# Altium PCB Main.PcbDoc (part 3 of 4)
Units mm, origin at the board's own origin, x right, y up, seen from the top; angles counter-clockwise.
Board outline 172.29 x 85.1 mm, 6 copper layers (Component Side, Ground Plane, Signal Layer 1, Signal Layer 2, Power Plane, Solder Side), stack 1.297 mm thick; 277 components, 256 nets, 1030 pads, 416 vias.
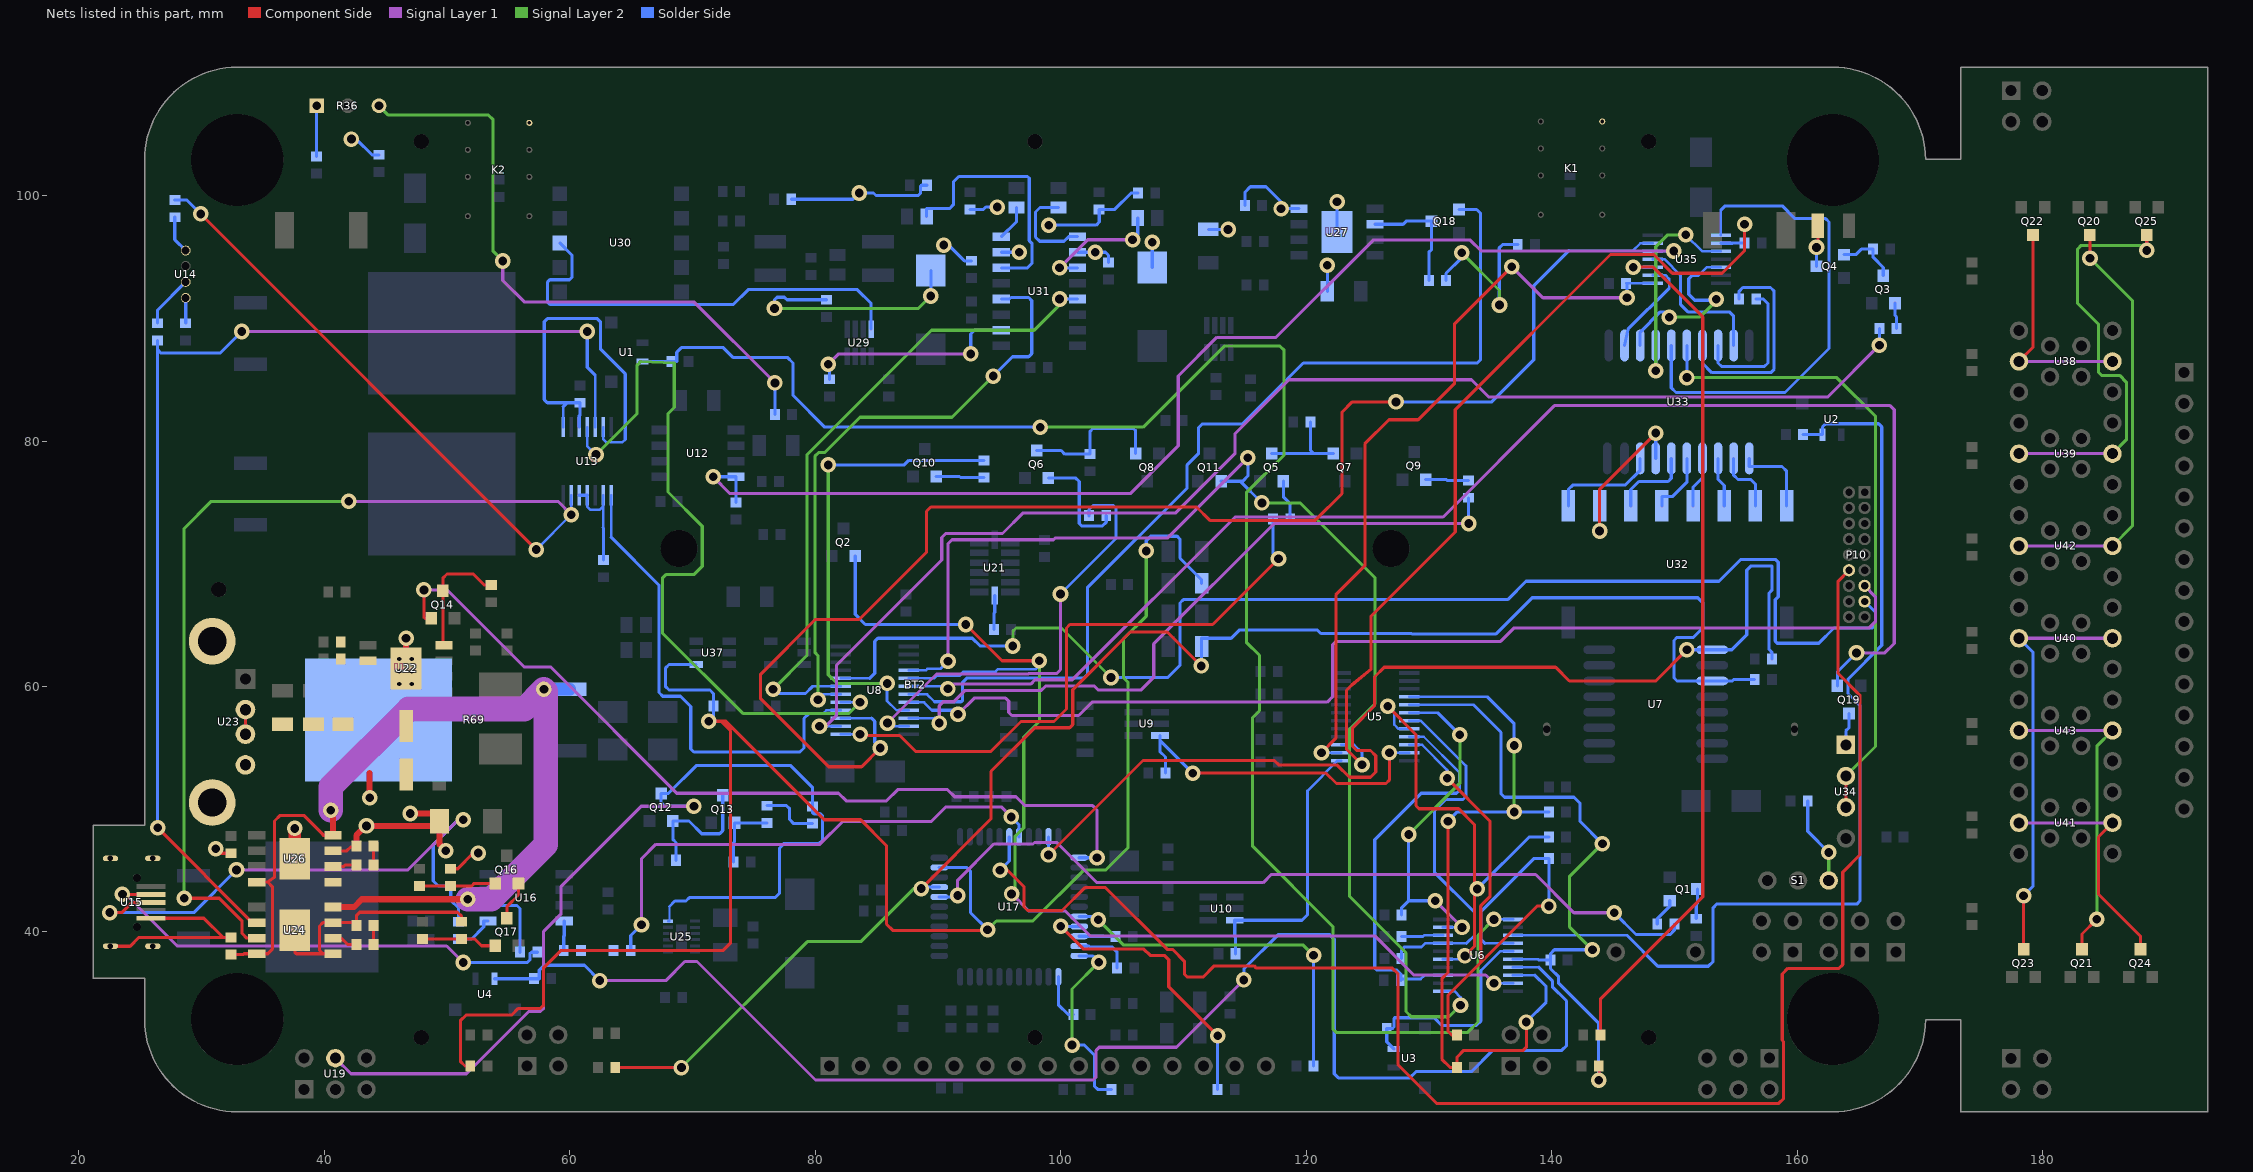
[diagram p7: the nets of this part, all layers, seen from the top]

## Via types
v1: diameter 1.27, hole 0.711, Component Side to Solder Side, tented both sides, 407 vias
v2: diameter 0.66, hole 0.33, Component Side to Solder Side, 8 vias
v3: diameter 1.27, hole 0.711, Component Side to Solder Side, 1 vias

## Nets (pads, with @x,y where several pads share a name; then routed paths per layer and width w, separated by ;. In a path a pad name is that pad's centre, name@x,y a point inside that pad or via, vN(x,y) a via of type N, cw(c..) or ccw(c..) an arc to the next point about the centre after c; other vN are vias at no path point) (continued)
NetP10_12: P10.12 U17.6 | length 132.4
  Component Side w0.254: v1(95.047,45.034) 95.656,45.034 97.003,43.688 97.003,42.037 97.282,41.758 100.099,41.758 101.956,43.614 103.632,43.614 108.66,38.586 109.093,38.586 110.058,37.621 110.058,36.576 110.312,36.322 111.582,36.322 112.497,37.236 115.748,37.236 115.926,37.059 127,37.059 127.483,36.576 127.483,29.159 130.607,26.035 158.496,26.035 158.877,26.416 158.877,31.081 158.769,31.189 158.769,36.576 159.226,37.033 163.398,37.033 163.703,37.338 163.703,44.882 165.1,46.279 165.1,59.284 163.322,61.062 163.322,68.58 P10.12@164.211,69.469
  Solder Side w0.254: v1(95.047,45.034) 95.796,45.783 U17.6@95.796,47.752
NetP10_13: P10.13 U8.8 | length 89.8
  Signal Layer 1 w0.254: v1(91.618,57.734) 92.939,59.055 95.504,59.055 95.758,58.801 95.758,57.887 96.012,57.633 101.448,57.633 102.54,58.725 121.691,58.725 122.149,59.182 122.149,63.398 122.428,63.678 135.831,63.678 136.931,64.778 165.862,64.778 166.362,65.278 166.362,67.318 P10.13@165.481,68.199
  Solder Side w0.21: U8.8@87.611,58.715 88.849,58.715 89.5,58.064
  Solder Side w0.254: 89.5,58.064 91.288,58.064 v1(91.618,57.734)
NetP10_15: P10.15 U8.20 | length 107.2
  Signal Layer 2 w0.254: v1(96.088,63.297) 96.088,64.516 96.342,64.77 100.051,64.77 v1(104.089,60.731)
  Solder Side w0.21: U8.20@82.061,60.665 84.43,60.665
  Solder Side w0.254: 84.43,60.665 84.836,61.071 84.836,63.678 85.09,63.932 92.786,63.932 93.421,63.297 v1(96.088,63.297) ; v1(104.089,60.731) 108.712,60.731 109.703,61.722 109.703,66.802 109.982,67.081 136.398,67.081 137.897,68.58 153.619,68.58 155.372,70.333 158.242,70.333 158.445,70.129 158.445,67.31 158.2,67.065 158.2,63.694 158.369,63.525 161.747,63.525 162.992,64.77 166.116,64.77 166.37,65.024 166.37,66.04 P10.15@165.481,66.929
NetQ1_1: Q1.1 R2.2 | length 2.5
  Solder Side w0.254: R2.2@151.765,41.086 151.765,42.24 151.856,42.331 Q1.1@151.856,43.5
NetQ1_2: Q1.2 R1.2 | length 2.3
  Solder Side w0.254: R1.2@148.587,40.64 148.587,41.072 149.606,42.091 Q1.2@149.606,42.55
NetQ2_2: Q2.2 U6.19 U8.5 | length 96.6
  Component Side w0.254: v1(92.253,65.049) 95.2,62.103 v1(98.247,62.103)
  Signal Layer 1 w0.254: v1(95.987,43.104) 97.384,41.707 100.355,41.707 102.374,39.688 125.564,39.688 128.753,36.5 134.606,36.5 v1(135.28,35.825)
  Signal Layer 2 w0.254: v1(95.987,43.104) 96.253,43.37 96.253,47.764 96.977,48.488 96.977,55.88 98.247,57.15 v1(98.247,62.103)
  Solder Side w0.21: U8.5@87.611,60.665 89.665,60.665 89.872,60.872 91.73,60.872 92.07,61.212 94.678,61.212 94.858,61.392 97.917,61.392 98.247,61.722 v1(98.247,62.103) ; v1(135.28,35.825) U6.19@136.835,35.825
  Solder Side w0.254: Q2.2@83.246,70.63 83.246,65.877 84.074,65.049 v1(92.253,65.049)
NetQ3_1: Q3.1 Q4.2 R23.2 | length 5.1
  Solder Side w0.254: Q4.2@163.812,95.184 164.77,95.184 165.217,95.631 R23.2@166.178,95.631 166.178,94.959 167.005,94.132 Q3.1@167.005,93.472
NetQ3_2: Q3.2 R22.2 | length 2.1
  Solder Side w0.254: Q3.2@167.955,91.222 167.955,90.25 168.086,90.119 R22.2@168.086,89.154
NetQ4_1: Q4.1 U11.1 | length 3.3
  Component Side w0.254: v1(161.562,95.774) 161.671,95.883 U11.1@161.671,97.536
  Solder Side w0.254: Q4.1@161.562,94.234 v1(161.562,95.774)
NetQ5_1: Q5.1 Q7.2 R27.2 | length 7.7
  Solder Side w0.254: Q5.1@117.18,78.976 120.606,78.976 ; R27.2@120.334,81.534 120.334,79.248 120.606,78.976 ; Q7.2@122.189,78.976 120.606,78.976
NetQ5_2: Q5.2 R25.2 | length 3.3
  Solder Side w0.254: Q5.2@118.13,76.726 118.13,75.457 118.683,74.905 R25.2@118.683,73.66
NetQ6_1: Q6.1 Q8.2 R29.2 | length 12.1
  Solder Side w0.254: Q6.1@98.034,79.23 100.025,79.23 100.323,78.932 R29.2@102.362,78.932 102.362,80.764 102.616,81.018 105.918,81.018 106.091,80.845 Q8.2@106.091,78.976
NetQ6_2: Q6.2 R26.2 | length 9
  Solder Side w0.254: Q6.2@98.984,76.98 101.226,76.98 101.498,76.708 101.498,73.279 101.702,73.076 103.378,73.076 103.697,73.395 R26.2@103.697,73.914
NetQ9_2: Q9.2 R28.2 | length 3.5
  Solder Side w0.254: Q9.2@129.728,76.853 131.42,76.853 131.5,76.773 R28.2@133.223,76.773
NetQ10_2: Q10.2 R30.2 | length 3.9
  Solder Side w0.254: Q10.2@89.85,77.107 91.745,77.107 91.828,77.024 R30.2@93.726,77.024
NetQ11_2: Q11.2 U6.1 U8.4 | length 103.9
  Signal Layer 1 w0.254: v1(90.805,62.055) 90.805,71.628 91.135,71.958 99.401,71.958 99.528,72.085 108.679,72.085 v1(115.235,78.641)
  Signal Layer 2 w0.254: v1(116.383,74.955) 119.507,74.955 125.586,68.876 125.586,58.581 123.52,56.515 123.52,42.901 128.118,38.303 128.118,33.528 128.549,33.096 131.623,33.096 v1(132.563,34.036)
  Solder Side w0.21: U8.4@87.611,61.315 89.006,61.315 89.154,61.463 90.213,61.463 ; U6.1@131.135,35.175 132.059,35.175 132.563,34.671 v1(132.563,34.036)
  Solder Side w0.254: 90.213,61.463 v1(90.805,62.055) ; Q11.2@113.06,76.726 114.612,76.726 ; v1(115.235,78.641) 115.235,77.153 114.808,76.726 114.612,76.726 ; v1(116.383,74.955) 114.612,76.726
NetQ12_2: Q12.2 Q13.3 R54.1 | length 10.8
  Solder Side w0.254: R54.1@68.645,45.847 68.645,47.295 68.387,47.553 Q12.2@68.387,49.04 69.705,49.04 70.739,48.006 72.202,48.006 72.456,48.26 Q13.3@72.456,51.145
NetQ13_2: Q13.2 R58.2 R60.2 | length 5.9
  Solder Side w0.254: R58.2@73.341,45.72 73.341,47.269 73.406,47.334 Q13.2@73.406,48.895 74.727,48.895 74.73,48.892 R60.2@76.073,48.892
NetQ14_1: Q14.1 R67.2 U22.4 | length 10
  Component Side w0.254: U22.4@49.757,63.373 49.657,63.373 Q14.1@49.657,67.8 49.657,68.834 49.987,69.164 52.124,69.164 53.024,68.264 R67.2@53.594,68.264
NetQ14_2: Q14.2 U17.12 | length 71.2
  Component Side w0.254: v1(48.108,67.869) 48.108,65.639 48.197,65.55 Q14.2@48.707,65.55
  Signal Layer 1 w0.254: v1(48.108,67.869) 49.99,67.869 56.26,61.599 58.416,61.599 68.707,51.308 81.88,51.308 82.507,50.681 85.793,50.681 86.712,51.6 90.768,51.6 91.346,51.022 96.349,51.022 97.079,50.292 102.591,50.292 102.946,49.936 v1(102.946,46.052)
  Solder Side w0.254: U17.12@101.496,46.052 v1(102.946,46.052)
NetQ16_2: Q16.2 R71.1 R76.2 | length 6.2
  Component Side w0.254: R71.1@47.752,43.75 48.997,43.75 R76.2@50.292,43.75 51.994,43.75 52.204,43.96 Q16.2@53.914,43.96
NetQ16_3: Q16.3 Q17.1 | length 3.2
  Component Side w0.254: Q17.1@54.864,41.13 54.864,42.062 55.814,43.012 Q16.3@55.814,43.96
NetQ17_2: Q17.2 R72.1 R75.2 | length 6.1
  Component Side w0.254: R72.1@48.006,39.432 49.581,39.432 R75.2@51.181,39.432 52.248,39.432 52.8,38.88 Q17.2@53.914,38.88
NetQ18_1: Q18.1 R82.2 U27.2 | length 9.6
  Solder Side w0.254: U27.2@125.603,97.663 127.889,97.663 128.143,97.917 Q18.1@130.193,97.917 130.193,95.587 129.983,95.377 R82.2@129.983,93.091
NetQ18_2: Q18.2 U8.7 | length 79.5
  Solder Side w0.21: U8.7@87.611,59.365 89.106,59.365 89.713,58.758
  Solder Side w0.254: 89.713,58.758 91.879,58.758 91.999,58.877 91.999,60.35 92.329,60.681 95.163,60.681 95.188,60.706 101.905,60.706 102.159,60.96 102.159,68.047 110.287,76.175 110.287,78.054 111.227,78.994 111.227,81.102 111.506,81.382 114.783,81.382 119.761,86.36 133.934,86.36 134.188,86.614 134.188,98.552 133.873,98.867 Q18.2@132.443,98.867
NetQ19_1: Q19.1 U34.1 | length 2.7
  Solder Side w0.254: U34.1@163.957,55.245 163.957,56.388 164.211,56.642 Q19.1@164.211,57.803
NetQ19_2: Q19.2 U8.6 | length 115.8
  Signal Layer 1 w0.254: v1(90.802,59.814) 91.186,60.198 97.536,60.198 97.892,60.554 100.94,60.554 114.198,73.812 131.14,73.812 140.208,82.88 167.564,82.88 167.894,82.55 167.894,63.5 167.132,62.738 v1(164.821,62.738)
  Solder Side w0.21: U8.6@87.611,60.015 v1@90.602,60.015
  Solder Side w0.254: v1@90.602,60.015 v1(90.802,59.814) ; Q19.2@163.261,60.053 163.261,61.178 v1(164.821,62.738)
NetQ20_1: Q20.1 U42.3 U42.8 | length 35.1
  Component Side w0.254: Q20.1@183.832,96.792 183.832,94.907 v1(183.845,94.894)
  Signal Layer 1 w0.254: U42.8@178.054,71.45 U42.3@185.674,71.45
  Signal Layer 2 w0.254: v1(183.845,94.894) 187.313,91.427 187.313,73.089 U42.3@185.674,71.45
NetQ21_1: Q21.1 U43.3 U43.8 | length 26.5
  Component Side w0.254: Q21.1@183.197,38.59 183.197,39.84 v1(184.404,41.046)
  Signal Layer 1 w0.254: U43.8@178.054,56.413 U43.3@185.674,56.413
  Signal Layer 2 w0.254: v1(184.404,41.046) 184.404,55.143 U43.3@185.674,56.413
NetQ22_1: Q22.1 U38.3 U38.8 | length 18.4
  Component Side w0.254: U38.3@178.054,86.487 179.197,87.63 Q22.1@179.197,96.792
  Signal Layer 1 w0.254: U38.3@178.054,86.487 U38.8@185.674,86.487
NetQ23_1: Q23.1 U40.3 U40.8 | length 33.8
  Component Side w0.254: Q23.1@178.435,38.59 v1(178.435,42.951)
  Signal Layer 1 w0.254: U40.3@178.054,63.932 U40.8@185.674,63.932
  Solder Side w0.254: U40.3@178.054,63.932 179.197,62.789 179.197,43.713 v1(178.435,42.951)
NetQ24_1: Q24.1 U41.3 U41.8 | length 19.8
  Component Side w0.254: U41.8@185.674,48.895 184.531,47.752 184.531,43.078 187.96,39.649 Q24.1@187.96,38.59
  Signal Layer 1 w0.254: U41.3@178.054,48.895 U41.8@185.674,48.895
NetQ25_1: Q25.1 U39.3 U39.8 | length 34.5
  Component Side w0.254: v1(188.468,95.529) Q25.1@188.468,96.792
  Signal Layer 1 w0.254: U39.3@178.054,78.969 U39.8@185.674,78.969
  Signal Layer 2 w0.254: U39.8@185.674,78.969 186.805,80.1 186.805,84.797 186.258,85.344 184.785,85.344 184.531,85.598 184.531,89.51 182.829,91.211 182.829,95.631 183.134,95.936 188.062,95.936 v1(188.468,95.529)
NetR1_1: R1.1 U17.40 | length 66.8
  Signal Layer 1 w0.254: v1(91.592,42.977) 91.592,44.221 94.539,47.168 97.726,47.168 97.853,47.295 99.67,47.295 102.946,44.018 116.484,44.018 117.145,44.679 138.684,44.679 141.794,41.569 v1(145.096,41.569)
  Solder Side w0.254: U17.40@90.096,42.852 91.468,42.852 v1(91.592,42.977) ; v1(145.096,41.569) 146.863,39.802 149.657,39.802 149.987,40.132 R1.1@149.987,40.64
NetR3_1: R3.1 U1.2 U6.11 | length 143
  Signal Layer 2 w0.254: v1(98.323,81.128) 106.705,81.128 113.309,87.732 117.856,87.732 118.186,87.401 118.186,78.867 115.113,75.794 115.113,63.602 116.18,62.535 116.18,58.039 115.621,57.48 115.621,46.99 122.174,40.437 122.174,32.08 122.428,31.826 133.147,31.826 133.985,32.664 133.985,39.73 v1(135.28,41.025)
  Solder Side w0.21: v1(135.28,41.025) U6.11@136.835,41.025
  Solder Side w0.254: U1.2@65.913,86.487 R3.1@68.261,86.487 68.707,86.487 68.707,87.224 69.088,87.605 72.492,87.605 73.279,86.817 77.724,86.817 78.181,86.36 78.181,83.715 80.769,81.128 v1(98.323,81.128)
NetR4_1: R4.1 U3.2 U6.15 | length 18.1
  Solder Side w0.21: 134.214,36.855 135.783,38.425 U6.15@136.835,38.425
  Solder Side w0.254: U3.2@127.127,30.48 126.554,31.053 R4.1@126.554,32.131 127.011,32.131 127.138,32.258 127.138,32.955 127.199,33.016 130.408,33.016 131.039,32.385 133.858,32.385 134.214,32.741 134.214,36.855
NetR5_1: R5.1 U2.2 U6.13 | length 81.5
  Solder Side w0.21: U6.13@136.835,39.725 146.127,39.725
  Solder Side w0.254: 146.127,39.725 148.641,37.211 152.756,37.211 153.137,37.592 153.137,41.986 153.416,42.266 164.846,42.266 165.1,42.52 165.1,58.471 164.135,59.436 164.135,60.604 166.878,63.348 166.878,81.153 166.624,81.407 162.306,81.407 162.052,81.153 U2.2@162.052,80.518 R5.1@160.466,80.518
NetR6_1: R6.1 U4.2 U6.17 | length 121.8
  Signal Layer 1 w0.254: v1(62.433,36.043) 67.818,36.043 69.367,37.592 70.358,37.592 80.01,27.94 102.616,27.94 102.87,28.194 102.87,30.353 103.124,30.607 109.423,30.607 v1(114.91,36.093)
  Solder Side w0.21: U6.17@136.835,37.125 138.94,37.125
  Solder Side w0.254: U4.2@53.848,36.195 R6.1@57.085,36.195 57.506,36.195 57.506,36.881 57.912,37.287 61.189,37.287 v1(62.433,36.043) ; v1(114.91,36.093) 114.91,36.982 117.704,39.776 121.92,39.776 122.276,39.421 122.276,28.448 122.606,28.118 128.422,28.118 128.93,28.626 133.452,28.626 135.179,30.353 140.818,30.353 141.199,30.734 141.199,34.392 140.048,35.542 140.048,36.017 138.94,37.125
NetR7_1: R7.1 U6.8 | length 3.4
  Solder Side w0.21: 129.489,39.624 129.59,39.725 U6.8@131.135,39.725
  Solder Side w0.254: R7.1@127.762,39.624 129.489,39.624
NetR8_1: R8.1 R109.2 U5.4 U6.18 | length 61.8
  Component Side w0.254: v1(131.547,49.022) 131.547,36.703 131.039,36.195 131.039,29.642 131.724,28.956 R109.2@132.269,28.956 132.269,29.794 132.828,30.353 137.668,30.353 137.922,30.607 v1(137.922,32.664)
  Signal Layer 2 w0.254: v1(136.931,49.784) v1(136.931,55.194)
  Solder Side w0.21: U5.4@128.378,59.156 134.748,59.156 ; U6.18@136.835,36.475 138.621,36.475
  Solder Side w0.254: v1(131.547,49.022) 132.309,49.784 v1(136.931,49.784) R8.1@139.762,49.784 ; 134.748,59.156 136.931,56.972 v1(136.931,55.194) ; v1(137.922,32.664) 139.54,34.282 139.54,35.556 138.621,36.475
NetR9_1: R9.1 R111.1 U5.10 U6.14 | length 52.6
  Component Side w0.254: v1(131.47,52.527) 134.953,49.045 134.953,42.865 134.214,42.126 134.214,37.516 ; R111.1@132.269,31.623 131.826,31.623 131.547,31.902 131.547,34.849 134.214,37.516 ; v1(139.762,42.113) 138.811,42.113 134.214,37.516
  Solder Side w0.21: U5.10@128.378,55.256 129.427,55.256 131.47,53.213 ; 134.534,39.075 U6.14@136.835,39.075
  Solder Side w0.254: v1(131.47,52.527) 131.47,53.213 ; 134.534,39.075 134.239,39.37 134.239,41.681 138.532,45.974 R9.1@139.762,45.974 v1(139.762,42.113)
NetR12_1: R12.1 R110.1 U5.5 U6.16 | length 54.5
  Component Side w0.254: v1(143.815,27.922) 143.829,27.936 R110.1@143.829,29.083
  Signal Layer 2 w0.254: v1(143.307,38.557) 141.427,40.437 141.427,44.501 v1(144.12,47.193)
  Solder Side w0.21: U5.5@128.378,58.506 133.62,58.506 ; U6.16@136.835,37.775 138.876,37.775 138.932,37.719 R12.1@139.889,37.719
  Solder Side w0.254: 133.62,58.506 135.865,56.261 135.865,51.257 136.144,50.978 141.808,50.978 142.291,50.495 142.291,49.022 v1(144.12,47.193) ; v1(143.307,38.557) 140.208,38.557 139.889,38.238 R12.1@139.889,37.719 139.889,37.017 140.556,36.35 140.556,35.822 143.815,32.563 v1(143.815,27.922)
NetR13_2: R13.2 U5.9 U6.3 | length 32.2
  Solder Side w0.21: U5.9@128.378,55.906 129.565,55.906 132.486,52.985 ; 129.309,36.167 129.617,36.475 U6.3@131.135,36.475
  Solder Side w0.254: R13.2@127.7,36.068 R13.2@127.7,36.167 ; 129.309,36.167 R13.2@127.7,36.167 ; 132.486,52.985 132.486,51.562 132.232,51.308 129.362,51.308 125.578,47.523 125.578,37.059 125.73,36.906 127.37,36.906 127.7,36.576 R13.2@127.7,36.167
NetR14_2: R14.2 U5.7 U6.7 | length 30.3
  Solder Side w0.21: U5.7@128.378,57.206 129.332,57.206 133.013,53.525 ; 129.388,38.786 129.677,39.075 U6.7@131.135,39.075 133.054,39.075
  Solder Side w0.254: R14.2@127.762,37.846 127.762,38.532 128.016,38.786 129.388,38.786 ; 133.013,53.525 133.013,51.054 132.759,50.8 131.369,50.8 130.429,49.86 130.429,44.869 133.695,41.603 133.695,39.716 133.054,39.075
NetR15_2: R15.2 U5.8 U6.5 | length 38.3
  Component Side w0.254: v1(126.632,58.382) 128.93,56.083 128.93,50.292 129.184,50.038 132.41,50.038 133.706,48.743 v1@133.706,43.282 ; v1(132.918,38.049) 133.706,38.837 v1@133.706,43.282 ; v1(133.934,43.51) v1@133.706,43.282
  Solder Side w0.21: v1(126.632,58.382) 127.162,57.851 127.162,56.896 127.502,56.556 U5.8@128.378,56.556 ; U6.5@131.135,37.775 132.644,37.775 v1(132.918,38.049)
  Solder Side w0.254: v1(133.934,43.51) 138.176,47.752 R15.2@139.762,47.752
NetR16_2: R16.2 U5.6 U6.9 | length 28.3
  Signal Layer 1 w0.254: v1(130.509,42.545) v1(132.679,40.375)
  Signal Layer 2 w0.254: v1(128.335,47.944) 132.505,52.114 v1(132.505,56.065)
  Solder Side w0.21: U5.6@128.378,57.856 130.714,57.856 ; U6.9@131.135,40.375 v1(132.679,40.375)
  Solder Side w0.254: R16.2@127.762,41.402 127.762,41.972 128.335,42.545 ; v1(128.335,47.944) 128.335,42.545 ; v1(130.509,42.545) 128.335,42.545 ; 130.714,57.856 v1(132.505,56.065)
NetR17_1: R17.1 S1.3 | length 7.2
  Signal Layer 2 w0.254: S1.3@162.56,44.196 v1(162.56,46.482)
  Solder Side w0.254: R17.1@160.847,50.673 160.847,48.195 v1(162.56,46.482)
NetR19_1: R19.1 U7.1 U17.10 | length 89.9
  Component Side w0.254: v1(98.996,46.279) 106.692,53.975 117.399,53.975 117.78,53.594 122.53,53.594 123.52,52.603 125.222,52.603 125.652,53.033 125.652,54.358 125.222,54.788 124.104,54.788 123.774,55.118 123.774,56.642 125.552,58.42 125.552,60.771 126.351,61.57 140.31,61.57 141.427,60.452 148.463,60.452 v1(151.003,62.992)
  Solder Side w0.254: v1(98.996,46.279) U17.10@98.996,47.752 ; v1(151.003,62.992) U7.1@153.063,62.992 154.661,62.992 155.88,64.211 155.88,69.48 156.21,69.81 157.912,69.81 157.926,69.796 157.926,67.828 157.692,67.594 157.692,63.039 157.926,62.805 R19.1@157.926,62.23
NetR20_1: R20.1 U5.11 U9.3 | length 27.4
  Component Side w0.254: v1(110.754,52.94) 121.607,52.94 122.452,52.095 126.492,52.095 126.767,52.371 v1(126.767,54.606)
  Solder Side w0.21: v1(126.767,54.606) U5.11@128.378,54.606
  Solder Side w0.254: U9.3@108.068,56.012 108.068,55.626 ; R20.1@108.523,52.959 108.523,54.254 108.068,54.709 108.068,55.626 ; v1(110.754,52.94) 108.068,55.626
NetR21_1: R21.1 U5.13 U10.3 | length 22.7
  Solder Side w0.21: 120.091,51.492 122.555,53.956 U5.13@122.828,53.956
  Solder Side w0.254: R21.1@114.238,38.227 114.238,39.548 114.164,39.622 U10.3@114.164,40.96 119.649,40.96 120.091,41.402 120.091,51.492
NetR22_1: R22.1 U8.14 | length 107.8
  Signal Layer 1 w0.254: v1(80.34,56.765) 80.844,56.765 81.737,57.658 81.737,61.747 90.297,70.307 90.297,72.136 90.627,72.466 95.25,72.466 96.926,74.143 109.361,74.143 114.18,78.961 114.18,80.575 118.593,84.988 133.452,84.988 134.849,83.591 162.484,83.591 v1(166.686,87.794)
  Solder Side w0.21: v1(80.34,56.765) U8.14@82.061,56.765
  Solder Side w0.254: v1(166.686,87.794) R22.1@166.686,89.154
NetR25_1: R25.1 U8.13 | length 50.1
  Component Side w0.254: v1(83.642,56.115) 83.75,56.007 86.868,56.007 88.163,54.712 94.31,54.712 96.749,57.15 99.441,57.15 100.457,58.166 100.457,64.77 100.736,65.049 112.37,65.049 v1(117.729,70.409)
  Solder Side w0.21: U8.13@82.061,56.115 v1(83.642,56.115)
  Solder Side w0.254: R25.1@117.283,73.66 117.283,70.855 v1(117.729,70.409)
NetR26_1: R26.1 U8.11 | length 35.7
  Signal Layer 1 w0.254: v1(85.877,57.023) 89.875,61.021 97.343,61.021 97.384,61.062 99.663,61.062 99.974,61.373 v1(99.974,67.539)
  Solder Side w0.21: v1(85.877,57.023) 86.135,56.765 U8.11@87.611,56.765
  Solder Side w0.254: v1(99.974,67.539) 104.496,72.06 104.496,74.549 104.292,74.752 102.616,74.752 102.297,74.433 R26.1@102.297,73.914
NetR28_1: R28.1 U8.10 | length 57.3
  Signal Layer 1 w0.254: v1(90.094,57.023) 90.094,58.428 90.424,58.758 91.276,58.758 92.208,59.69 98.412,59.69 98.768,60.046 102.734,60.046 103.073,59.707 106.519,59.707 107.569,60.757 107.569,63.475 117.373,73.279 v1(133.223,73.279)
  Solder Side w0.21: U8.10@87.611,57.415 v1@89.702,57.415
  Solder Side w0.254: v1@89.702,57.415 v1(90.094,57.023) ; v1(133.223,73.279) R28.1@133.223,75.373
NetR30_1: R30.1 U8.9 | length 38.5
  Signal Layer 2 w0.254: v1(81.051,78.054) 81.051,60.96 81.763,60.249 v1(85.852,60.249)
  Solder Side w0.21: 85.852,58.827 86.614,58.065 U8.9@87.611,58.065
  Solder Side w0.254: v1(81.051,78.054) 87.249,78.054 87.619,78.424 R30.1@93.726,78.424 ; 85.852,58.827 v1(85.852,60.249)
NetR35_1: R35.1 R36.1 | length 4.1
  Solder Side w0.254: R35.1@39.37,103.189 R36.1@39.37,107.315
NetR36_2: R36.2 R40.2 | length 51.4
  Signal Layer 1 w0.254: v1(54.534,94.666) 54.534,93.082 56.277,91.338 70.104,91.338 v1(76.708,84.734)
  Signal Layer 2 w0.254: R36.2@44.45,107.315 45.212,106.553 53.365,106.553 53.746,106.172 53.746,95.453 v1(54.534,94.666)
  Solder Side w0.254: R40.2@76.708,82.169 v1(76.708,84.734)
NetR37_1: R37.1 U13.2 U13.4 U13.5 | length 8.4
  Solder Side w0.21: U13.4@61.412,75.584 61.412,74.676 61.691,74.397 62.433,74.397 62.712,74.676 ; 62.712,72.949 62.712,74.676 ; U13.2@62.712,75.584 62.712,74.676
  Solder Side w0.254: U13.5@60.762,75.584 U13.4@61.412,75.584 ; 62.712,72.949 62.738,72.923 R37.1@62.738,70.296
NetR38_1: R38.1 U13.8 U13.10 U13.13 | length 31.7
  Solder Side w0.21: U13.8@59.462,81.134 59.462,82.804 ; U13.13@62.712,81.134 62.712,80.163 62.992,79.883 64.262,79.883 64.516,80.137
  Solder Side w0.254: 59.462,82.804 59.778,83.12 ; U13.10@60.762,81.134 60.762,82.067 60.833,82.138 R38.1@60.833,83.12 59.778,83.12 ; 64.516,80.137 64.516,85.471 62.484,87.503 62.484,89.713 62.23,89.967 58.166,89.967 57.912,89.713 57.912,83.374 58.166,83.12 59.778,83.12
NetR39_1: R39.1 U12.4 U35.12 | length 96.7
  Signal Layer 1 w0.254: v1(71.679,77.089) 73.05,75.717 105.664,75.717 109.564,79.617 109.564,85.298 112.709,88.443 117.526,88.443 125.451,96.368 133.35,96.368 134.239,95.479 v1(149.936,95.479)
  Solder Side w0.21: U35.12@148.228,95.463 v1@149.921,95.463
  Solder Side w0.254: v1(71.679,77.089) U12.4@73.537,77.089 73.537,76.026 73.533,76.022 R39.1@73.533,74.995 ; v1@149.921,95.463 v1(149.936,95.479)
NetR41_1: R41.1 U14.1 | length 3.1
  Solder Side w0.254: R41.1@27.813,98.233 27.813,96.408 U14.1@28.702,95.519
NetR41_2: R41.2 U13.6 U24.7 | length 117.8
  Component Side w0.254: v1(28.575,42.754) 31.432,42.754 33.299,40.887 33.299,39.878 33.68,39.497 U24.7@34.495,39.497 ; v1(29.921,98.501) v1(57.267,71.155)
  Signal Layer 1 w0.254: v1(41.986,75.082) 59.03,75.082 v1(60.122,73.99)
  Signal Layer 2 w0.254: v1(28.575,42.754) 28.575,72.873 30.785,75.082 v1(41.986,75.082)
  Solder Side w0.21: v1(57.267,71.155) v1@60.112,74 ; U13.6@60.112,75.584 v1@60.112,74 ; v1(60.122,73.99) v1@60.112,74
  Solder Side w0.254: R41.2@27.813,99.633 28.789,99.633 v1(29.921,98.501)
NetR42_1: R42.1 U14.3 | length 4.3
  Solder Side w0.254: R42.1@26.416,89.6 26.416,90.678 U14.3@28.702,92.964
NetR42_2: R42.2 U13.12 U24.6 | length 94.9
  Component Side w0.254: v1(26.416,48.489) 34.138,40.767 U24.6@34.495,40.767
  Signal Layer 1 w0.254: v1(33.274,88.925) v1(61.417,88.925)
  Solder Side w0.21: U13.12@62.062,81.134 62.062,85.369
  Solder Side w0.254: v1(26.416,48.489) 26.416,87.427 ; R42.2@26.416,88.2 26.416,87.427 ; v1(33.274,88.925) 31.521,87.173 26.67,87.173 26.416,87.427 ; v1(61.417,88.925) 61.417,86.014 62.062,85.369
NetR43_1: R43.1 U14.4 | length 2.1
  Solder Side w0.254: R43.1@28.702,89.6 U14.4@28.702,91.664
NetR44_1: R44.1 R46.1 U15.3 | length 46.7
  Component Side w0.254: v1(22.504,41.58) 23.495,41.58 24.333,42.418 U15.3@25.874,42.418
  Signal Layer 1 w0.254: v1(32.842,45.06) 46.812,45.06 50.902,49.149 v1(51.308,49.149)
  Solder Side w0.254: v1(22.504,41.58) 29.362,41.58 v1(32.842,45.06) ; R46.1@50.927,40.832 50.927,41.961 50.292,42.596 R44.1@50.292,43.75 49.276,43.75 48.87,44.156 48.87,47.117 50.902,49.149 v1(51.308,49.149)
NetR45_1: R45.1 U15.2 | length 39.1
  Component Side w0.254: v1(23.546,43.068) U15.2@25.874,43.068
  Signal Layer 1 w0.254: v1(23.546,43.068) 23.8,43.068 28.006,38.862 49.962,38.862 v1(51.308,37.516)
  Solder Side w0.254: v1(51.308,37.516) 56.54,37.516 56.744,37.719 56.744,38.227 56.871,38.354 R45.1@57.342,38.354
NetR45_2: R45.2 U16.6 | length 6.3
  Solder Side w0.254: U16.6@53.34,42.164 55.688,42.164 55.942,41.91 R45.2@55.942,38.354
NetR46_2: R46.2 U16.5 | length 3.3
  Solder Side w0.254: R46.2@50.927,39.432 51.994,39.432 52.984,40.423 52.984,40.894 U16.5@53.34,40.894
NetR49_1: R49.1 R50.2 | length 2.7
  Solder Side w0.254: R49.1@60.898,38.481 R50.2@63.562,38.481
NetR49_2: R49.2 U16.4 | length 2.4
  Solder Side w0.254: R49.2@59.498,38.481 59.498,39.649 59.54,39.691 U16.4@59.54,40.894
NetR50_1: R50.1 U17.7 | length 42
  Signal Layer 1 w0.254: v1(65.837,40.589) 65.837,45.974 67.005,47.142 80.366,47.142 82.22,48.997 89.446,48.997 90.64,50.19 95.148,50.19 v1(95.961,49.378)
  Solder Side w0.254: R50.1@64.962,38.481 64.962,39.714 v1(65.837,40.589) ; v1(95.961,49.378) 96.596,48.743 U17.7@96.596,47.752
NetR59_1: R59.1 R60.1 | length 4.8
  Solder Side w0.254: R60.1@76.073,50.292 77.648,50.292 77.902,50.038 77.902,49.16 78.232,48.83 R59.1@79.756,48.83
NetR62_1: R62.1 U21.7 | length 2.8
  Solder Side w0.254: R62.1@94.55,64.643 94.55,65.989 94.615,66.054 U21.7@94.615,67.416
NetR65_1: R65.1 R66.1 U22.6 | length 0
NetR69_1: R69.1 R73.2 U24.4 U24.8 U26.4 U26.8 | length 80
  Component Side w0.254: R73.2@32.385,38.162 33.401,38.162 33.466,38.227 U24.8@34.495,38.227 35.382,38.227 35.763,38.608 35.763,43.688 35.382,44.069 ; U26.8@34.495,44.069 35.382,44.069 ; 39.878,47.879 39.941,47.879 ; U26.4@40.695,47.879 39.941,47.879 ; 35.382,44.069 35.941,44.45 35.941,49.047 36.395,49.501 38.319,49.501 39.941,47.879
  Component Side w0.5: v1(40.513,49.911) 40.695,49.729 U26.4@40.695,47.879 ; U24.4@40.695,42.037 42.415,42.037 43.05,42.672 v1(51.689,42.672)
  Signal Layer 1 w0.5: v1(57.887,59.777) v1@58.039,59.625
  Signal Layer 1 w2: v1(40.513,49.911) 40.513,51.816 46.863,58.166 56.276,58.166 v1(57.887,59.777) ; v1(51.689,42.672) 53.594,42.672 58.039,47.117 v1@58.039,59.625
  Solder Side w1: v1(57.887,59.777) R69.1@60.006,59.777
NetR70_1: R70.1 U24.2 | length 2.1
  Component Side w0.254: U24.2@40.695,39.497 41.377,39.497 41.885,38.989 R70.1@42.607,38.989
NetR70_2: R70.2 R77.2 | length 1.5
  Component Side w0.254: R70.2@44.007,38.989 R77.2@44.007,40.513
NetR74_1: R74.1 U26.2 | length 2
  Component Side w0.254: U26.2@40.695,45.339 41.58,45.339 41.707,45.466 R74.1@42.607,45.466
NetR74_2: R74.2 R78.2 | length 1.5
  Component Side w0.254: R74.2@44.007,45.466 R78.2@44.007,46.99
NetR86_1: R86.1 U33.17 | length 17.8
  Solder Side w0.254: U33.17@152.273,87.785 152.273,86.335 153.035,85.573 157.836,85.573 158.115,85.852 158.115,92.202 157.81,92.507 155.561,92.507 155.256,92.202 R86.1@155.256,91.567
NetR86_2: R86.2 U33.18 | length 11.7
  Solder Side w0.254: U33.18@153.543,87.785 153.543,86.36 153.822,86.081 157.328,86.081 157.607,86.36 157.607,91.186 157.226,91.567 R86.2@156.656,91.567
NetR87_1: R87.1 U5.14 U35.8 | length 63.9
  Component Side w0.254: v1(121.234,54.61) 122.403,55.778 122.403,67.462 124.765,69.825 124.765,79.771 126.731,81.737 129.108,81.737 132.08,84.709 132.08,89.56 v1(136.728,94.209)
  Signal Layer 1 w0.254: v1(136.728,94.209) 139.268,91.669 v1(146.126,91.669)
  Solder Side w0.21: v1(121.234,54.61) 121.238,54.606 U5.14@122.828,54.606 ; R87.1@146.05,92.837 R87.1@146.126,92.837 ; v1(146.126,91.669) R87.1@146.126,92.837 ; R87.1@146.126,92.837 147.117,92.837 ; 147.117,92.837 147.143,92.863 U35.8@148.228,92.863 147.117,92.837
NetR88_1: R88.1 U5.15 U35.2 | length 72
  Component Side w0.254: v1(124.536,53.619) 123.266,54.889 123.266,59.69 123.698,60.122 125.267,61.4 125.267,65.729 132.131,72.593 132.131,82.55 144.78,95.199 148.295,95.199 149.824,93.67 153.868,93.67 155.702,95.504 v1(155.702,97.663)
  Solder Side w0.21: U5.15@122.828,55.256 123.89,55.256 124.536,54.61
  Solder Side w0.254: v1(124.536,53.619) 124.536,54.61 ; U35.2@153.778,96.113 154.711,96.113 154.737,96.139 R88.1@155.702,96.139 v1(155.702,97.663)
NetR112_1: R112.1 U35.10 | length 70.9
  Component Side w0.254: R112.1@143.956,31.623 143.956,34.533 152.298,42.875 152.298,90.119 148.255,94.163 v1(146.634,94.163)
  Solder Side w0.21: v1(146.634,94.163) U35.10@148.228,94.163
NetU8_15: U8.15 U35.13 | length 117.4
  Component Side w0.254: v1(85.293,54.991) 83.769,53.467 81.077,53.467 75.54,59.004 75.54,61.011 79.985,65.456 83.566,65.456 89.052,70.942 89.052,74.27 89.408,74.625 111.049,74.625 112.141,73.533 120.726,73.533 122.911,75.717 122.911,82.347 123.749,83.185 v1(127.305,83.185)
  Solder Side w0.21: U8.15@82.061,57.415 84.582,57.415 ; 141.376,95.504 146.609,95.504 147.218,96.113 U35.13@148.228,96.113
  Solder Side w0.254: 84.582,57.415 84.836,57.161 84.836,55.448 v1(85.293,54.991) ; v1(127.305,83.185) 135.103,83.185 138.532,86.614 138.532,92.659 141.376,95.504
NetU8_16: U8.16 U13.1 | length 39.3
  Solder Side w0.21: 63.362,72.147 U13.1@63.362,75.584 ; 79.451,57.785 80.619,57.785 80.899,58.065 U8.16@82.061,58.065
  Solder Side w0.254: 63.362,72.147 67.259,68.25 67.259,59.512 67.564,59.207 69.012,59.207 69.85,58.369 69.85,54.915 70.104,54.661 78.74,54.661 79.07,54.991 79.07,57.404 79.451,57.785
NetU8_17: U8.17 U13.11 | length 61.2
  Signal Layer 2 w0.254: v1(62.128,78.892) 65.481,82.245 65.481,86.182 65.786,86.487 68.504,86.36 68.504,82.728 67.996,82.22 67.996,75.844 70.781,73.059 70.781,69.79 70.104,69.113 67.818,69.113 67.539,68.834 67.539,64.364 74.092,57.81 82.738,57.81 v1(83.642,58.715)
  Solder Side w0.21: U13.11@61.412,81.134 61.412,79.609 v1(62.128,78.892) ; U8.17@82.061,58.715 v1(83.642,58.715)
NetU8_18: U8.18 U31.12 | length 50
  Signal Layer 2 w0.254: v1(80.213,58.928) 80.213,62.509 79.985,62.738 79.985,78.791 80.264,79.07 80.772,79.07 83.642,81.94 91.135,81.94 v1(94.488,85.293)
  Solder Side w0.21: v1(80.213,58.928) 80.65,59.365 U8.18@82.061,59.365
  Solder Side w0.254: v1(94.488,85.293) 96.063,86.868 97.374,86.868 97.628,87.122 97.628,91.44 97.374,91.694 95.936,91.694 95.809,91.567 U31.12@95.15,91.567
NetU8_19: U8.19 U31.5 | length 53.7
  Signal Layer 2 w0.254: v1(76.556,59.766) 79.324,62.535 79.324,78.892 89.459,89.027 97.824,89.027 99.898,91.102 v1(99.898,91.567)
  Solder Side w0.21: 79.776,60.015 U8.19@82.061,60.015
  Solder Side w0.254: v1(76.556,59.766) 76.886,59.436 79.197,59.436 79.776,60.015 ; v1(99.898,91.567) U31.5@101.35,91.567
NetU23_2: U23.2 U23.3 | length 2
  Component Side w0.254: U23.3@33.571,56.116 U23.2@33.571,58.116
NetU32_1: U32.1 U33.8 | length 8.8
  Solder Side w0.254: U32.1@141.351,74.727 141.351,76.048 141.732,76.429 145.999,76.429 147.193,77.622 U33.8@147.193,78.585
NetU32_2: U32.2 U33.7 | length 14
  Component Side w0.254: v1(143.891,72.669) 143.891,76.073 v1(148.463,80.645)
  Solder Side w0.254: v1(143.891,72.669) U32.2@143.891,74.727 ; U33.7@148.463,78.585 v1(148.463,80.645)
NetU32_3: U32.3 U33.6 | length 6.6
  Solder Side w0.254: U32.3@146.431,74.727 146.431,76.048 147.091,76.708 149.479,76.708 149.733,76.962 U33.6@149.733,78.585
NetU32_4: U32.4 U33.5 | length 5.2
  Solder Side w0.254: U32.4@148.971,74.727 148.971,75.489 149.86,75.489 151.003,76.632 U33.5@151.003,78.585
NetU32_5: U32.5 U33.4 | length 4.2
  Solder Side w0.254: U32.5@151.511,74.727 151.511,76.251 152.273,77.013 U33.4@152.273,78.585
NetU32_6: U32.6 U33.3 | length 4.1
  Solder Side w0.254: U33.3@153.543,78.585 153.543,76.886 154.051,76.378 U32.6@154.051,74.727
NetU32_7: U32.7 U33.2 | length 5.2
  Solder Side w0.254: U33.2@154.813,78.585 154.813,77.216 155.169,76.86 156.21,76.86 156.591,76.479 U32.7@156.591,74.727
NetU32_8: U32.8 U33.1 | length 6.7
  Solder Side w0.254: U33.1@156.083,78.585 156.083,77.927 158.75,77.927 159.131,77.546 U32.8@159.131,74.727
NetU33_12: U33.12 U35.9 | length 8.3
  Solder Side w0.21: U35.9@148.228,93.513 149.26,93.513 149.555,93.218 149.555,92.456
  Solder Side w0.254: U33.12@145.923,87.785 146.191,89.092 149.555,92.456
NetU33_13: U33.13 U35.5 | length 15.6
  Signal Layer 2 w0.254: v1(149.555,90.094) 152.044,90.094 153.391,91.44 v1(153.391,91.542)
  Solder Side w0.21: 151.943,93.472 152.634,94.163 U35.5@153.778,94.163
  Solder Side w0.254: U33.13@147.193,87.785 147.193,88.875 148.84,90.522 149.127,90.522 v1(149.555,90.094) ; 151.943,93.472 151.409,93.472 151.155,93.218 151.155,91.948 151.637,91.466 153.315,91.466 v1(153.391,91.542)
NetU33_14: U33.14 U35.3 | length 18.4
  Signal Layer 2 w0.254: v1(148.463,85.725) 148.463,95.833 149.43,96.799 v1(150.901,96.799)
  Solder Side w0.21: v1(150.901,96.799) 152.238,95.463 U35.3@153.778,95.463
  Solder Side w0.254: v1(148.463,85.725) U33.14@148.463,87.785
NetU33_15: U33.15 U35.1 | length 39.8
  Solder Side w0.21: 153.772,98.806 153.772,96.763 U35.1@153.778,96.763
  Solder Side w0.254: U33.15@149.733,87.785 149.733,84.328 150.114,83.947 158.997,83.947 162.585,87.536 162.585,97.841 162.306,98.12 159.817,98.12 158.775,99.162 154.127,99.162 153.772,98.806
NetU33_16: U33.16 U34.2 U34.3 | length 52.1
  Component Side w0.254: U34.3@163.957,50.165 U34.2@163.957,52.705
  Signal Layer 2 w0.254: v1(151.003,85.166) 163.22,85.166 166.37,82.017 166.37,55.118 U34.2@163.957,52.705
  Solder Side w0.254: v1(151.003,85.166) U33.16@151.003,87.785
NetU33_19: U33.19 U35.11 | length 12.3
  Solder Side w0.21: U35.11@148.228,94.813 149.179,94.813 150.495,93.497
  Solder Side w0.254: 150.495,93.497 150.495,91.11 151.079,90.526 154.457,90.526 154.813,90.17 U33.19@154.813,87.785
OUTL+: L6.1 U31.1 | length 7.8
  Solder Side w0.254: L6.1@99.822,99.022 98.298,99.022 97.932,98.656 97.932,96.613 98.272,96.273 100.261,96.273 100.635,96.647 U31.1@101.35,96.647
OUTL-: L3.1 U31.3 | length 10.3
  Signal Layer 1 w0.254: v1(99.898,94.107) 102.184,96.393 v1(105.842,96.393)
  Solder Side w0.254: v1(99.898,94.107) U31.3@101.35,94.107 ; v1(105.842,96.393) 106.261,96.812 L3.1@106.261,98.171
OUTR+: L8.1 U31.16 | length 2.9
  Solder Side w0.254: U31.16@95.15,96.647 96.393,97.89 L8.1@96.393,99.022
OUTR-: L9.1 U31.14 | length 20.9
  Solder Side w0.254: L9.1@89.065,98.298 89.065,98.933 90.932,98.933 91.244,99.245 91.244,101.099 91.694,101.549 97.282,101.549 97.424,101.407 97.424,96.327 97.638,96.114 97.638,94.463 97.282,94.107 U31.14@95.15,94.107
PGND: C21.1 C22.1 C24.1 C25.1 C29.1 C30.1 C31.2 C32.2 C33.2 C34.2 L10.1 R48.1 R82.1 R83.1 R84.2 U27.8 U27.9 U31.2 U31.15 | length 80.7
  Signal Layer 2 w0.254: v1(76.672,90.805) 88.397,90.805 v1(89.408,91.816) ; v1(132.664,95.337) 135.738,92.264 v1(135.738,91.084)
  Solder Side w0.254: v1(76.672,90.805) 76.672,91.505 76.883,91.717 77.476,91.717 77.688,91.505 R83.1@80.899,91.505 ; L10.1@78.043,99.695 83.058,99.695 v1(83.566,100.203) 84.734,100.203 84.938,100 88.392,100 88.571,100.178 88.571,100.774 88.634,100.838 C30.1@89.092,100.838 ; v1(89.408,91.816) C31.2@89.408,93.878 ; v1(90.464,95.961) 90.859,95.961 92.14,94.68 C32.2@92.71,94.68 ; C29.1@92.583,98.868 93.697,98.868 93.889,99.06 v1(94.829,99.06) ; U31.15@95.15,95.377 v1(96.612,95.377) ; v1(99.024,97.587) 102.87,97.587 103.124,97.841 C25.1@103.124,98.868 104.394,98.868 105.729,100.203 C24.1@106.296,100.203 ; U31.2@101.35,95.377 v1(102.812,95.377) 103.632,95.377 103.886,95.123 C34.2@103.886,94.553 ; C33.2@107.442,94.132 v1(107.442,96.194) ; C22.1@112.014,97.235 v1(113.626,97.235) ; R48.1@114.997,99.187 114.997,100.265 115.443,100.711 116.713,100.711 117.941,99.483 v1(117.941,98.933) U27.8@119.403,98.933 ; C21.1@121.713,92.202 v1(121.713,94.322) ; U27.9@122.503,97.028 v1(122.503,99.49) ; R82.1@131.383,93.091 131.383,93.661 132.664,94.942 v1(132.664,95.337) ; v1(135.738,91.084) 135.712,91.11 135.712,95.733 135.992,96.012 R84.2@137.222,96.012
POWER_GND: BT2.2 C12.1 C13.1 C15.1 C39.1 C40.1 C41.1 K1.6 K2.6 R63.2 R69.3 R73.1 R75.1 R76.1 R77.1 R78.1 U15.5 U15.6 U15.7 U15.8 U15.9 U22.9 U23.4 U23.5 U23.6 U24.1 U24.3 U24.9 U26.1 U26.3 U26.9 | length 68.8
  Component Side w0.254: U15.9@22.574,38.843 24.176,38.843 24.895,39.562 31.736,39.562 ; U15.5@25.874,41.118 30.18,41.118 31.736,39.562 ; v1(31.155,46.787) 31.242,46.417 C15.1@32.385,46.417 ; R73.1@32.385,39.562 31.736,39.562 ; U24.9@37.595,40.355 37.617,40.332 37.595,40.31 U24.9@37.595,40.132 37.595,38.354 37.722,38.227 39.878,38.227 ; U24.1@40.695,38.227 39.878,38.227 ; U26.3@40.695,46.609 41.834,46.609 42.164,46.939 R78.1@42.607,46.939 ; C39.1@41.148,56.689 40.894,56.943 C39.1@41.529,56.943 ; R77.1@42.607,40.513 R77.1@42.607,40.767 ; R76.1@50.292,45.15 50.862,45.15 52.143,46.431 v1(52.538,46.431) ; R75.1@51.181,40.832 51.181,41.275 50.843,41.613 42.883,41.613 42.607,41.337 R77.1@42.607,40.767 ; 39.878,38.227 39.599,38.506 39.599,40.488 39.878,40.767 U24.3@40.695,40.767 R77.1@42.607,40.767
  Component Side w0.5: R78.1@42.607,46.939 R78.1@42.607,46.99 42.607,47.876 43.372,48.641 v1(43.434,48.641) BT2.2@49.386,48.641 ; v1(43.688,50.927) 43.688,52.959 ; U22.9@46.657,61.468 v1(46.657,63.93) ; v1(46.99,49.657) 48.751,49.657 BT2.2@49.386,49.022 BT2.2@49.386,48.641 ; v1(49.894,46.625) 49.386,47.133 BT2.2@49.386,48.641
  Component Side w1: U26.9@37.595,45.974 v1(37.595,48.436)
  Solder Side w0.254: v1(42.204,104.597) 42.599,104.597 43.88,103.316 R63.2@44.45,103.316
  Solder Side w0.5: 46.657,62.913 v1(46.657,63.93)
  other v2: 46.101,60.198 47.117,60.198 46.101,61.214 47.117,61.214 46.101,62.23 47.117,62.23
POWER_INT: D1.2 R89.1 R105.2 U17.43 U37.4 | length 148.8
  Component Side w0.254: R105.2@51.878,29.083 51.46,29.083 51.079,29.464 51.079,32.766 51.537,33.223 55.245,33.223 55.804,33.782 57.607,33.782 57.861,34.036 57.861,37.084 59.258,38.481 72.466,38.481 73.101,39.116 73.101,56.388 72.323,57.166 ; v1(71.314,57.166) 72.323,57.166 ; v1(94.031,40.183) 93.957,40.109 86.332,40.109 85.801,40.64 85.801,47.041 83.693,49.149 80.714,49.149 72.697,57.166 72.323,57.166
  Signal Layer 2 w0.254: v1(94.031,40.183) 94.742,40.894 97.72,40.894 101.862,45.036 103.632,45.036 105.486,46.89 105.486,60.323 105.105,60.704 105.105,63.881 106.959,65.735 v1(106.959,71.044)
  Solder Side w0.254: U37.4@70.277,61.788 68.072,61.788 67.805,61.521 67.805,59.982 68.072,59.715 71.411,59.715 71.69,59.436 R89.1@71.69,58.42 71.69,57.542 v1(71.314,57.166) ; U17.43@90.096,45.252 92.34,45.252 92.634,44.958 92.634,41.58 v1(94.031,40.183) ; v1(106.959,71.044) 106.959,71.882 107.315,72.238 109.474,72.238 109.703,72.009 109.703,70.463 111.459,68.707 D1.2@111.459,68.411
POWER_ON: Q12.1 R59.2 U19.5 U25.12 | length 84.4
  Signal Layer 1 w0.254: U19.5@40.894,29.718 42.164,28.448 51.574,28.448 56.654,33.528 57.607,33.528 57.861,33.782 57.861,40.056 59.284,41.478 59.284,43.713 65.811,50.241 v1(70.104,50.241)
  Solder Side w0.175: U25.12@67.988,40.874 68.111,40.874 68.111,42.076
  Solder Side w0.254: 68.111,42.076 68.555,42.52 69.458,42.52 69.739,42.8 76.709,42.8 77.089,43.18 77.089,46.838 77.47,47.219 80.315,47.219 80.594,47.498 80.594,49.428 80.391,49.632 79.883,49.632 79.756,49.759 R59.2@79.756,50.23 79.756,51.791 77.968,53.579 70.328,53.579 68.039,51.29 Q12.1@67.437,51.29 67.437,50.546 67.742,50.241 v1(70.104,50.241)
RIN: U29.8 U30.8 | length 36.5
  Solder Side w0.254: U30.8@59.182,96.139 60.173,95.148 60.173,93.345 59.969,93.142 58.369,93.142 58.191,92.964 58.191,91.313 58.369,91.135 73.33,91.135 74.524,92.329 83.414,92.329 84.541,91.202 U29.8@84.541,89.111
ROUT: R81.1 U31.10 | length 17.5
  Signal Layer 1 w0.254: v1(81.051,86.249) 81.899,87.097 v1(92.659,87.097)
  Solder Side w0.254: v1(81.051,86.249) 81.153,86.148 R81.1@81.153,85.028 ; v1(92.659,87.097) 92.659,88.722 92.964,89.027 U31.10@95.15,89.027
RTC_INT: D3.2 R18.1 R107.1 U7.3 U17.41 | length 128.5
  Component Side w0.254: R107.1@63.692,28.956 v1(69.088,28.956) ; v1(88.621,43.536) 94.31,49.225 94.31,53.086 97.866,56.642 100.711,56.642 100.965,56.896 100.965,59.741 105.666,64.442 108.663,64.442 v1(111.429,61.676)
  Signal Layer 2 w0.254: v1(69.088,28.956) 79.35,39.218 83.702,39.218 88.02,43.536 v1(88.621,43.536)
  Solder Side w0.254: v1(88.621,43.536) 88.737,43.652 U17.41@90.096,43.652 ; v1(111.429,61.676) 111.459,61.707 D3.2@111.459,63.246 111.459,63.932 113.868,63.932 114.529,64.592 120.904,64.592 121.183,64.313 128.575,64.313 128.6,64.287 135.458,64.287 138.405,67.234 151.892,67.234 152.298,66.827 152.298,64.77 151.536,64.008 150.203,64.008 149.949,63.754 149.949,60.706 150.203,60.452 U7.3@153.063,60.452 154.711,60.452 154.838,60.579 R18.1@156.526,60.579
S0: R103.1 U17.18 | length 29.4
  Signal Layer 2 w0.254: v1(103.048,40.998) 105.111,38.934 119.754,38.934 v1(120.588,38.1)
  Solder Side w0.254: U17.18@101.496,41.252 102.794,41.252 v1(103.048,40.998) ; R103.1@120.588,29.083 v1(120.588,38.1)
S1: R102.1 U17.19 | length 23.6
  Component Side w0.254: v1(100,40.462) 101.854,38.608 106.767,38.608 107.275,38.1 108.436,38.1 108.788,37.748 108.788,35.535 v1(112.773,31.55)
  Solder Side w0.254: v1(100,40.462) 100.01,40.452 U17.19@101.496,40.452 ; R102.1@112.773,27.178 v1(112.773,31.55)
S2: R92.1 U17.20 | length 3
  Solder Side w0.254: U17.20@101.496,39.652 103.485,39.652 103.513,39.624 R92.1@104.456,39.624
S3: R91.1 U17.21 | length 4.6
  Solder Side w0.254: U17.21@101.496,38.852 102.296,38.852 102.362,38.786 104.151,38.786 104.583,38.354 R91.1@104.583,37.084
S4: R104.1 U17.22 | length 15.7
  Signal Layer 2 w0.254: v1(100.914,30.785) 100.914,35.357 v1(103.099,37.541)
  Solder Side w0.254: v1(100.914,30.785) 101.93,30.785 102.743,29.972 102.743,27.432 102.997,27.178 R104.1@104.137,27.178 ; U17.22@101.496,38.052 102.588,38.052 v1(103.099,37.541)
S5: R101.1 U17.23 | length 3.8
  Solder Side w0.254: U17.23@99.796,36.352 99.796,34.075 100.597,33.274 R101.1@101.027,33.274